# EAGLE board Compass (EAGLE 5.11)
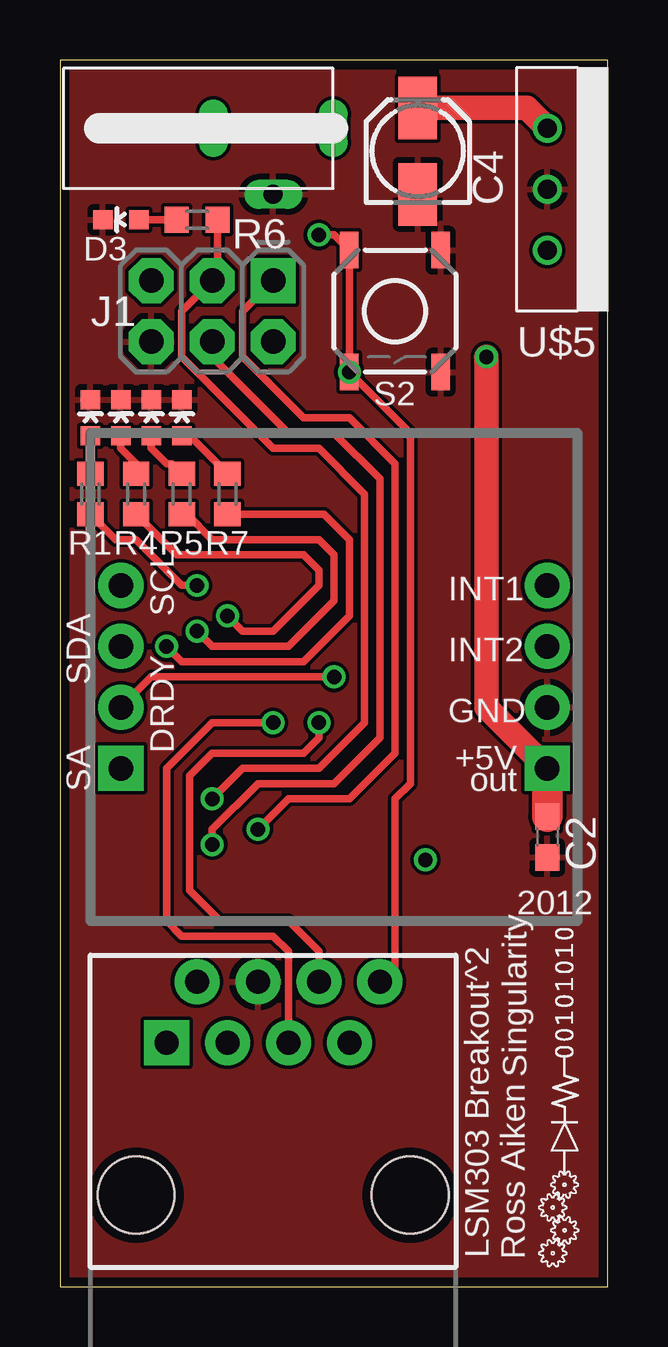
[diagram p0: board, top side]
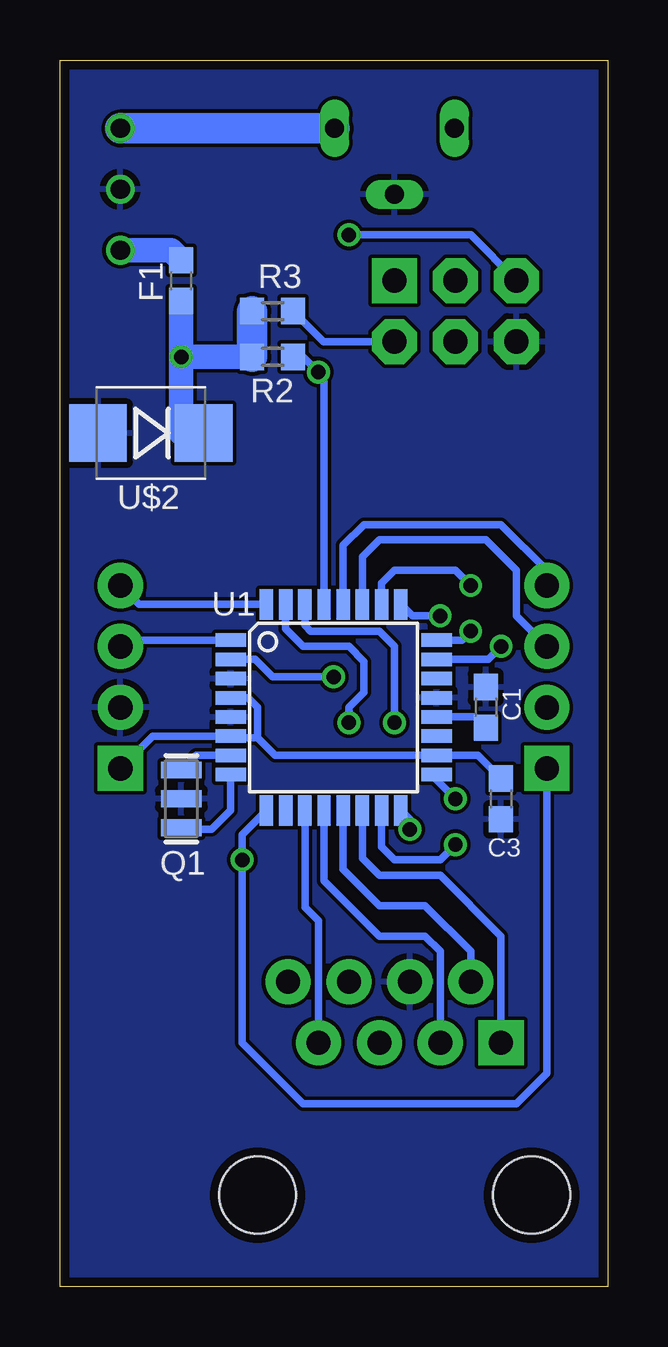
[diagram p1: board, bottom side, seen from below]

Size 22.84 x 51.1 mm. Coordinates in mm from the lower left corner, seen from the top.
Outline: 0,0 22.84,0 22.84,51.1 0,51.1 0,0
Copper layers (1*16): Top 0.0356mm / dielectric 1.5011mm / Bottom 0.0356mm
Design rules "default": minimum track width 6mil, minimum drill 13mil, track to track 6mil, track to pad 6mil, pad to pad 6mil, via to via 6mil, smd to smd 0mil, copper to edge 15mil, drill to drill 6mil, minimum pad ring 7mil, minimum via ring 7mil, stop-mask expansion 4mil, vias tented up to drill 0mil, thermal gap 10mil
Net classes: 0 default: width 0.203 mm; 1 vcc: width 0.254 mm

## Footprints (pad centres in the part's own frame; a part is rotated, then mirrored left to right if it is on the bottom)
C0603 = smd 1.1 x 1: 1 -0.85,0; 2 0.85,0
153CLV-0405 = smd 2.6 x 1.6: + 1.8,0; - -1.8,0
LED-0603 = smd 0.8 x 0.8: A 0,-0.75; C 0,0.75
2X3-NS = drill 1.016 pad 1.88 square: 1 -2.54,-1.27 | drill 1.016 pad 1.88 octagon: 2 -2.54,1.27; 3 0,-1.27; 4 0,1.27; 5 2.54,-1.27; 6 2.54,1.27
1X04_NO_SILK = drill 1.016 pad 1.88 square: 1 0,0 | drill 1.016 pad 1.88 round: 2 2.54,0; 3 5.08,0; 4 7.62,0
RESONATOR-SMD = smd 0.7 x 1.7: 1 -1.2,0; 2 0,0; 3 1.2,0
R0603 = smd 1 x 1.1: 1 -0.85,0; 2 0.85,0
TACTILE_SWITCH_SMD = smd 1.524 x 0.762: 1 -2.54,1.905; 2 2.54,1.905; 3 -2.54,-1.905; 4 2.54,-1.905
TQFP32-08 = smd 1.27 x 0.559: 1 -4.293,2.8; 2 -4.293,2; 3 -4.293,1.2; 4 -4.293,0.4; 5 -4.293,-0.4; 6 -4.293,-1.2; 7 -4.293,-2; 8 -4.293,-2.8; 17 4.293,-2.8; 18 4.293,-2; 19 4.293,-1.2; 20 4.293,-0.4; 21 4.293,0.4; 22 4.293,1.2; 23 4.293,2; 24 4.293,2.8 | smd 0.559 x 1.27: 9 -2.8,-4.293; 10 -2,-4.293; 11 -1.2,-4.293; 12 -0.4,-4.293; 13 0.4,-4.293; 14 1.2,-4.293; 15 2,-4.293; 16 2.8,-4.293; 25 2.8,4.293; 26 2,4.293; 27 1.2,4.293; 28 0.4,4.293; 29 -0.4,4.293; 30 -1.2,4.293; 31 -2,4.293; 32 -2.8,4.293
RJ45-8 = drill 1 pad 1.88 square: 1 -4.445,6.35 | drill 1 pad 1.88 round: 2 -3.175,8.89; 3 -1.905,6.35; 4 -0.635,8.89; 5 0.635,6.35; 6 1.905,8.89; 7 3.175,6.35; 8 4.445,8.89 | hole 3.2: -5.715,0; 5.715,0
SMB-DIODE = smd 2.4 x 2.4: A 2.2,0; C -2.2,0
BARREL-3.5MM = drill 0.8 long: 1 2.5,0; 2 -2.5,0; 3 0,-2.75
SIP-3 = drill 0.8 round: 1 -2.54,0; 2 0,0; 3 2.54,0

## Placement (x,y rotation side)
C1  0.1uF  [C0603]  5.08,24.13 270 bottom
C2  .1uF  [C0603]  20.32,18.73 270 top
C3  0.1uF  [C0603]  4.45,20.32 90 bottom
C4  47uF  [153CLV-0405]  14.92,47.31 90 top
D1  Green  [LED-0603]  1.27,36.2 0 top
D2  Green  [LED-0603]  2.54,36.2 0 top
D3  Green  [LED-0603]  2.54,44.45 90 top
D4  Green  [LED-0603]  3.81,36.2 0 top
D5  Green  [LED-0603]  5.08,36.2 0 top
F1  200mA  [C0603]  17.78,41.91 90 bottom
J1  AVR_SPI_PRG_6NS  [2X3-NS]  6.35,40.64 180 top
JP1  [1X04_NO_SILK]  2.54,21.59 90 top
JP2  [1X04_NO_SILK]  20.32,21.59 90 top
Q1  8/16/20MHz  [RESONATOR-SMD]  17.78,20.32 90 bottom
R1  330  [R0603]  1.27,33.02 270 top
R2  10K  [R0603]  13.97,38.73 180 bottom
R3  47  [R0603]  13.97,40.64 180 bottom
R4  330  [R0603]  3.17,33.02 270 top
R5  330  [R0603]  5.08,33.02 270 top
R6  330  [R0603]  5.71,44.45 180 top
R7  330  [R0603]  6.99,33.02 270 top
S2  Reset  [TACTILE_SWITCH_SMD]  13.97,40.64 270 top
U1  ATMEGA328  [TQFP32-08]  11.43,24.13 0 bottom
U$1  RJ45-8PTH  [RJ45-8]  8.89,3.81 0 top
U$2  DIODE-ZENERSMB  [SMB-DIODE]  19.05,35.56 180 bottom
U$3  BARREL-3.5MM  [BARREL-3.5MM]  8.89,48.26 0 top
U$5  OKI-78SR  [SIP-3]  20.32,45.72 270 top

## Library data of the parts
C1-C4 F1 R1-R7 = resistor
D1-D5 J1 JP1 JP2 Q1 S2 U1 U$1 U$2 = SparkFun
U$3 U$5 = #ROBO-Tutorial

## Nets
+24V: C4.+ U$3.1 U$5.1
A0: R7.2 U1.23
A1: R5.2 U1.24
A2: R4.2 U1.25
A3: R1.2 U1.26
AREF: C1.2 U1.20
D6: U1.10
D7: U1.11 U$1.7
D8: U1.12 U$1.3
D9: U1.13 U$1.2
D10: U1.14 U$1.1
DRDY: JP1.2 U1.2
GND [vcc]: C1.1 C2.2 C3.1 C4.- D1.C D2.C D3.C D4.C D5.C J1.6 JP2.2 Q1.2 S2.1 S2.2 U1.3 U1.5 U1.21 U$1.4 U$2.A U$3.3 U$5.2
INT1: JP2.4 U1.32
INT2: JP2.3 U1.1
MISO: J1.1 U1.16
MOSI: J1.4 U1.15
N$1: Q1.1 U1.8
N$2: Q1.3 U1.7
N$3: D1.A R1.1
N$4: D2.A R4.1
N$5: D4.A R5.1
N$6: J1.2 R3.1
N$7: D3.A R6.2
N$8: D5.A R7.1
N$9: F1.2 U$5.3
RESET: J1.5 R2.1 S2.3 S2.4 U1.29 U$1.8
RXI: U1.30 U$1.5
SA: JP1.1 U1.9
SCK: J1.3 R6.1 U1.17
SCL: JP1.4 U1.28
SDA: JP1.3 U1.27
TXO: U1.31 U$1.6
VCC: C2.1 C3.2 F1.1 JP2.1 R2.2 R3.2 U1.4 U1.6 U1.18 U$2.C

## Tracks (layer width: path | path; a pad name or v marks a point on that pad's centre or on a via)
+24V
  Top 1.016: C4.+ 19.47,49.11 U$5.1
  Bottom 1.27: U$3.1 U$5.1
A0  (via drill 0.6)
  Top 0.305: R7.2 11.01,32.17 12.06,31.11 12.06,27.94 10.16,26.04 5.08,26.04 v4.45,26.67
  Bottom 0.305: U1.23 4.99,26.13 v4.45,26.67
A1  (via drill 0.6)
  Top 0.305: R5.2 5.29,32.17 6.35,31.11 10.79,31.11 11.43,30.48 11.43,28.57 9.53,26.67 6.35,26.67 v5.71,27.3
  Bottom 0.305: v5.71,27.3 6.09,26.93 U1.24
A2  (via drill 0.6)
  Top 0.305: R4.2 4.87,30.48 10.16,30.48 10.79,29.84 10.79,29.21 8.89,27.3 7.62,27.3 v6.99,27.94
  Bottom 0.305: v6.99,27.94 8.15,27.94 U1.25
A3  (via drill 0.6)
  Top 0.305: R1.2 2.33,31.11 3.17,31.11 5.08,29.21 v5.71,29.21
  Bottom 0.305: v5.71,29.21 6.35,29.84 8.89,29.84 9.43,29.3 U1.26
AREF
  Bottom 0.305: C1.2 5.53,23.73 U1.20
D7
  Bottom 0.305: U1.11 12.63,15.8 12.06,15.24 U$1.7
D8
  Bottom 0.305: U1.12 11.83,16.91 9.53,14.61 7.62,14.61 6.99,13.97 U$1.3
D9
  Bottom 0.305: U1.13 11.03,17.38 9.53,15.88 7.62,15.88 5.71,13.97 U$1.2
D10
  Bottom 0.305: U1.14 10.23,17.85 9.53,17.14 6.99,17.14 4.45,14.61 U$1.1
DRDY  (via drill 0.6)
  Top 0.305: JP1.2 3.81,25.4 v11.43,25.4
  Bottom 0.305: v11.43,25.4 13.97,25.4 14.7,26.13 U1.2
GND
  pour Bottom (isolate 0.152): 0,51.44 22.86,51.44 22.86,0 0,0
  pour Top (isolate 0.152): 0,51.44 22.86,51.44 22.86,0 0,0
INT1
  Bottom 0.305: U1.32 19.53,28.42 JP2.4
INT2
  Bottom 0.305: U1.1 20.06,26.93 JP2.3
MISO  (via drill 0.6)
  Top 0.305: v8.26,19.05 9.53,20.32 12.06,20.32 13.97,22.23 13.97,34.29 12.06,36.2 10.16,36.2 7.62,38.73 7.62,40.64 J1.1
  Bottom 0.305: U1.16 8.26,19.46 v8.26,19.05
MOSI  (via drill 0.6)
  Top 0.305: v6.35,18.41 6.35,19.05 8.26,20.95 11.43,20.95 13.34,22.86 13.34,33.66 11.43,35.56 9.53,35.56 6.35,38.73 J1.4
  Bottom 0.305: U1.15 9.43,18.32 8.89,17.78 6.99,17.78 v6.35,18.41
N$1
  Bottom 0.305: U1.8 15.72,19.84 16.51,19.05 17.71,19.05 Q1.1
N$2
  Bottom 0.305: U1.7 17.17,22.13 Q1.3
N$3
  Top 0.305: D1.A R1.1
N$4
  Top 0.305: D2.A 2.54,34.92 3.17,34.29 R4.1
N$5
  Top 0.305: D4.A 3.81,34.92 4.45,34.29 4.66,34.29 R5.1
N$6
  Bottom 0.305: R3.1 11.85,39.37 J1.2
N$7
  Top 0.305: D3.A R6.2
N$8
  Top 0.305: D5.A 5.41,35.45 R7.1
N$9
  Bottom 1.016: U$5.3 18.2,43.18 F1.2
RESET  (via drill 0.6)
  Top 0.305: v10.79,43.81 11.43,43.81 S2.3 v12.06,38.1 14.61,35.56 14.61,20.95 13.97,20.32 13.97,13.34 U$1.8
  Bottom 0.305: R2.1 12.7,38.73 v12.06,38.1 11.83,37.87 U1.29 | J1.5 5.71,43.81 v10.79,43.81
RXI  (via drill 0.6)
  Top 0.305: v8.89,23.5 6.35,23.5 4.45,21.59 4.45,15.24 5.08,14.61 8.89,14.61 9.53,13.97 U$1.5
  Bottom 0.305: U1.30 12.63,27.55 12.38,27.3 9.53,27.3 8.89,26.67 v8.89,23.5
SA  (via drill 0.6)
  Bottom 0.305: U1.9 15.24,18.83 v15.24,17.78 15.24,10.16 12.7,7.62 3.81,7.62 2.54,8.89 JP1.1
SCK  (via drill 0.6)
  Top 0.305: v6.35,20.32 7.62,21.59 10.79,21.59 12.7,23.5 12.7,33.02 10.79,34.92 8.89,34.92 5.08,38.73 5.08,40.64 J1.3 6.57,42.12 R6.1
  Bottom 0.305: U1.17 7.14,21.11 v6.35,20.32
SCL
  Bottom 0.305: U1.28 11.03,30.88 10.16,31.75 4.45,31.75 2.54,29.84 JP1.4
SDA
  Bottom 0.305: JP1.3 3.81,27.94 3.81,29.84 5.08,31.11 9.53,31.11 10.23,30.41 U1.27
TXO  (via drill 0.6)
  Top 0.305: v10.79,23.5 10.79,22.86 10.16,22.23 6.35,22.23 5.4,21.27 5.4,16.51 6.67,15.24 9.53,15.24 10.79,13.97 U$1.6
  Bottom 0.305: U1.31 13.43,27.4 12.7,26.67 10.79,26.67 10.16,26.04 10.16,24.77 10.79,24.13 v10.79,23.5
VCC  (via drill 0.6)
  Top 1.016: v17.78,38.73 17.78,24.13 JP2.1
  Top 1.27: JP2.1 C2.1
  Bottom 0.305: 14.61,22.86 13.88,22.13 U1.18 5.41,22.13 C3.2 | 14.61,22.86 15.65,22.86 U1.6 18.98,22.93 JP2.1 | U1.4 15.01,24.53 14.61,24.13 14.61,22.86
  Bottom 1.016: v17.78,38.73 F1.1 | v17.78,38.73 R2.2 | v17.78,38.73 17.78,35.56 U$2.C
  Bottom 1.27: R2.2 R3.2

## Text on the board
tNames: INT1 | SCL | INT2 | SDA | GND | +5V | DRDY | out | SA | 2012 | Singularity | LSM303 Breakout^2 | Ross Aiken | E:/Users/Ross/Desktop/Logo_nocolor.bmp | E:/Users/Ross/Desktop/Logo_nocolor.bmp